# Altium PCB MasterBoard.PcbDoc (part 2 of 3)
Units mil, origin at the board's own origin, x right, y up, seen from the top; angles counter-clockwise.
Board outline 13400 x 7290 mil, 2 copper layers (Top Layer, Bottom Layer); 563 components, 331 nets, 1403 pads, 323 vias.
Unrouted connection lines stored in the file: 87.
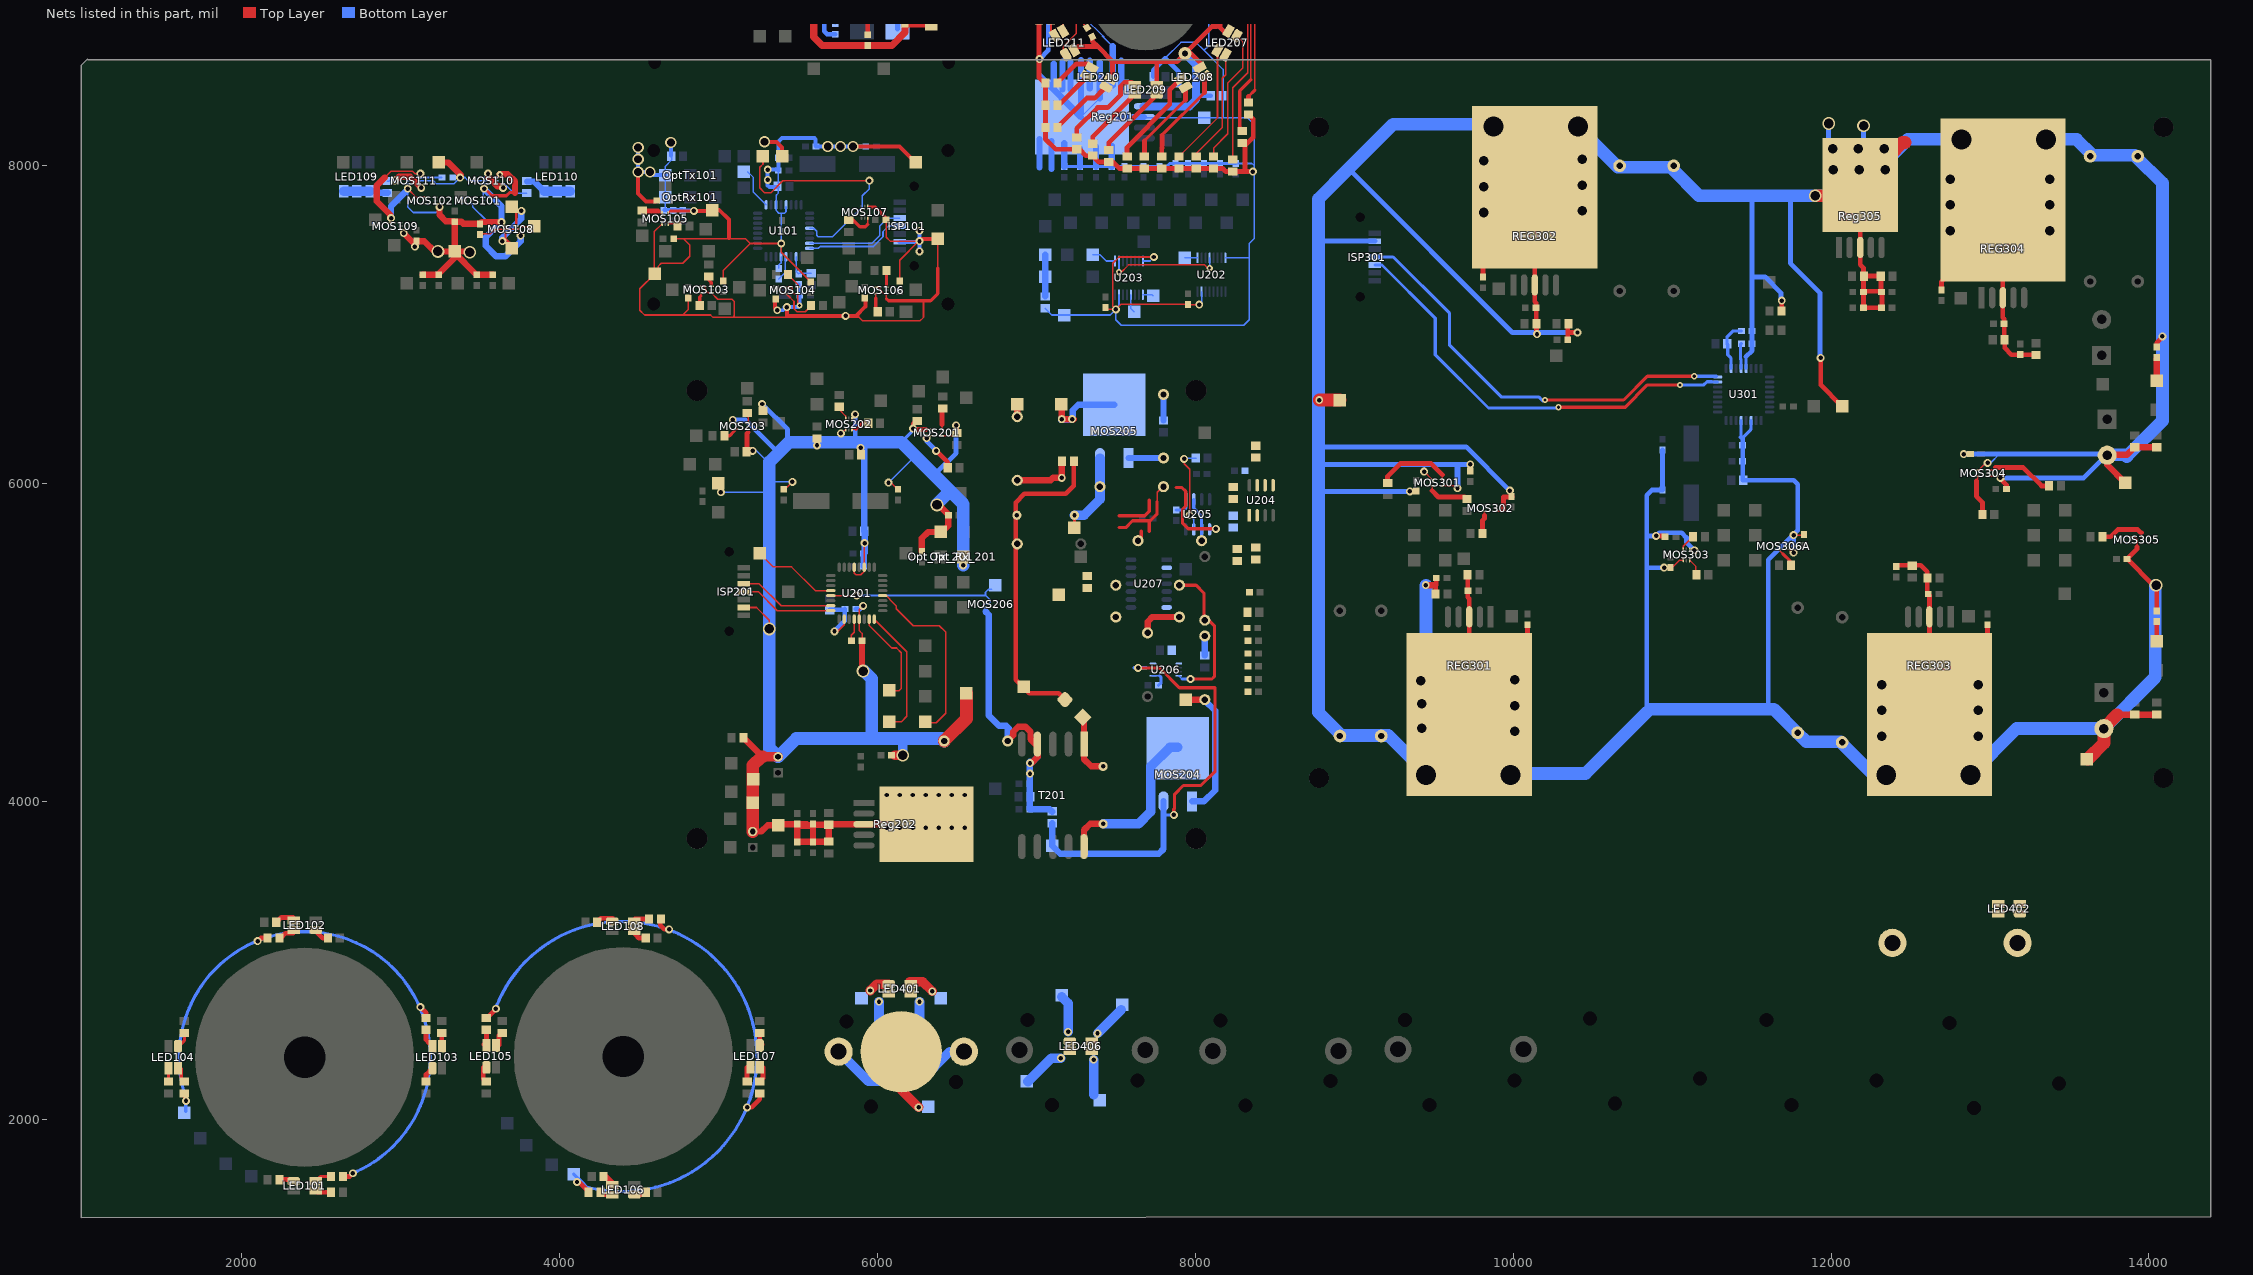
[diagram p2: the nets of this part, all layers, seen from the top]

## Via types
v1: diameter 50, hole 28, Top Layer to Bottom Layer, 217 vias
v2: diameter 80, hole 60, Top Layer to Bottom Layer, 55 vias
v3: diameter 40, hole 20, Top Layer to Bottom Layer, 25 vias
v4: diameter 70, hole 50, Top Layer to Bottom Layer, 11 vias
v5: diameter 145, hole 125, Top Layer to Bottom Layer, 8 vias
v6: diameter 80, hole 40, Top Layer to Bottom Layer, 2 vias
v7: diameter 60, hole 40, Top Layer to Bottom Layer, 2 vias
v8: diameter 50, hole 28, Top Layer to Bottom Layer, tented top, 1 vias
v9: diameter 100, hole 80, Top Layer to Bottom Layer, 1 vias
v10: diameter 100, hole 60, Top Layer to Bottom Layer, 1 vias

## Nets (pads, with @x,y where several pads share a name; then routed paths per layer and width w, separated by ;. In a path a pad name is that pad's centre, name@x,y a point inside that pad or via, vN(x,y) a via of type N, cw(c..) or ccw(c..) an arc to the next point about the centre after c; other vN are vias at no path point) (continued)
DATA203A: I207.1 U203.9 | length 68.1
  Bottom Layer w10: U203.9@7670,7187.4 7727.6,7187.4 I207.1@7735,7180
DATA204: I220.1 U201.28 | length 1163.7
  Top Layer w10: U201.28@6033.39,5294.25 6056.71,5294.25 6077.91,5273.05 6077.91,5269.83 6097.91,5249.83 6097.91,5248.8 6117.91,5228.8 6117.91,5212.09 6225,5105 6390,5105 6430,5065 6430,4555 6370,4495 I220.1@6305,4495
DATA204A: I208.1 U203.12 | length 115.7
  Bottom Layer w10: U203.12@7595,7187.4 7595,7100 I208.1@7615,7080
DATA_SELECT_201: I215.1 U201.23 | length 618.8
  Top Layer w10: U201.23@5948.74,5146.61 5948.74,5106.26 6090,4965 6120,4965 6150,4935 6150,4710 6135,4695 I215.1@6075,4695
DATA_SELECT_201A: I203.1 U202.1 | length 80
  Bottom Layer w10: I203.1@7935,7420 U202.1@8015,7420
DATA_SELECT_202: I218.1 U201.24 | length 825.9
  Top Layer w10: U201.24@5980.24,5146.61 6185,4941.85 6185,4535 6150,4500 I218.1@6075,4500 I218.1@6070,4500
DATA_SELECT_202A: I204.1 U203.1 | length 156.6
  Bottom Layer w10: I204.1@7355,7440 7400,7440 7440,7400 U203.1@7495,7400
EL_CONTROL_201: MOS206.2 TP225.1 U201.13 | length 1141.7
  Top Layer w10: U201.13@5706.61,5294.25 v1@5870,5294.25
  Bottom Layer w10: v1(5870,5295) 6680,5295 ; MOS206.2@6670,5240 MOS206.2@6680,5240 6697.06,5240 6708.78,5251.72 6708.78,5268.28 6682.06,5295 6680,5295 ; TP225.1@6720,5335 6700,5335 6680,5315 6680,5295
G_CONTROL_101: I110.1 I138.1 MOS108.3 MOS108.6 | length 469.9
  Top Layer w15: MOS108.3@3660,7577.5 3660,7540 3700,7500 I110.1@3700,7480 ; I138.1@3700,7735 3726.93,7708.07 3726.93,7625
  Bottom Layer w40: v1(3640,7525) 3640,7545 3760,7665 v1@3760,7710
  other v1: 3760,7715
G_CONTROL_101L: I112.1 R139.1 R141.1 R143.1 R145.1 | length 4043.2
  Top Layer w10: 2680,1640 v1(2700,1660)
  Top Layer w20: R145.1@1640,2162.6 1640,2125 v1(1650,2115)
  Top Layer w30: v1(2100,3120) 2120,3140 R141.1@2165,3140 ; R139.1@2633.46,1640 2680,1640 ; v1(3125,2705) 3160,2670 R143.1@3160,2633.46
  Bottom Layer w20: I112.1@1648.73,2048.73 1648.73,2115 1648.73,2134.69 cw(c2396.34,2390) v1@2699.75,1660.59
G_CONTROL_101R: I114.1 R147.1 R149.1 R151.1 R153.1 | length 4469.8
  Top Layer w30: R147.1@3540,2633.46 3600,2693.46 v1(3600,2695) ; v1@4110,1600 4126.54,1600 R149.1@4186.54,1540 ; R153.1@4633.46,3260 4633.46,3221.54 4660,3195 v1(4690,3195) ; v1(5180,2075) 5210,2075 5260,2125 R151.1@5260,2165
  Bottom Layer w20: v1@3596.36,2695.15 cw(c4391.6,2395) 4163.91,1576.06 ; I114.1@4090,1655 4145,1600 4165,1580
  other v1: 4110,1605
G_PWM_101: I131.1 U101.1 | length 254.2
  Bottom Layer w10: I131.1@5185,7960 5220,7925 5220,7833.15 U101.1@5299.76,7753.39
G_PWM_101A: I105.1 MOS108.2 MOS108.5 R108.2 | length 363.6
  Top Layer w10: R108.2@3500,7570 3565,7570 3595,7600 MOS108.2@3660,7600 MOS108.5@3726.93,7600 3743.99,7600 3758.99,7615 3840,7615 I105.1@3845,7615
GND101: C101.1 C102.1 C103.1 C104.1 C105.1 C106.1 C107.1 C108.1 C109.1 C126.1 C127.1 C128.1 I104.1 ISP101.6 MOS103.1 MOS103.4 MOS104.1 MOS104.4 MOS105.1 MOS105.4 MOS106.1 MOS106.4 MOS107.1 OptRx101.3 OptTx101.3 R112.1 R113.1 R114.1 R119.1 R120.1 R121.1 R125.1 R126.1 R127.1 S101.2 TP121.1 TP122.1 TP123.1 U101.3 U101.5 U101.21 | length 11585.5
  Top Layer w10: TP123.1@4595,7340 4595,7583.07 MOS105.4@4645,7633.07 ; MOS105.1@4685,7700 4700,7715 ; R119.1@4715,7540 R119.1@4718.46,7540 4780,7540 ; R113.1@4810,7166.54 4810,7095 4775,7060 ; MOS103.1@4890,7240 4910,7240 4918.78,7231.22 4918.78,7216.22 4935,7200 4955,7200 4955.96,7199.04 4995,7160 5085,7160 5100,7145 5100,7055 5090,7045 ; R121.1@5030,7275 5030,7340 5200,7510 ; MOS104.4@5430,7235 MOS104.4@5433.07,7235 5455,7235 5465,7225 5465,7205 5475,7195 MOS104.1@5500,7195 5500,7130 v3(5510,7120) v3@5515,7115 ; 5445,7045 5090,7045 ; R114.1@5580,7270 5395,7455 v1(5395,7510) 5200,7510 ; 5875,7055 5905,7025 6270,7025 6290,7045 6290,7145 ; MOS106.1@5990,7235 6007.06,7235 6025,7217.06 6025,7209.87 6039.87,7195 MOS106.4@6056.93,7195 ; R126.1@6055,7660 6055,7550 6080,7525 v1@6260,7525 ; 6056.93,7163.07 MOS106.4@6056.93,7195 ; MOS106.4@6060,7195 MOS106.4@6056.93,7195 ; R125.1@6140,7273.46 6140,7405 v1@6260,7525 ; v1(6265,7525) v1@6260,7525 ; v1@6265,7530 6262.5,7527.5 v1@6260,7525 ; 6380,7360 S101.2@6380,7525 ; 4775,7060 4535,7060 4505,7090 4505,7225 TP123.1@4600,7320 4620,7340 4620,7365 4640,7385 4775,7385 4820,7430 4820,7500 4780,7540 ; 4775,7060 4950,7060 4965,7045 5090,7045 ; 4780,7540 5170,7540 5200,7510
  Top Layer w20: 4700,7715 v1(4845,7715) ; 5950,7740 5985,7740 6053.46,7671.54 R126.1@6053.46,7660 ; 6056.93,7163.07 6070,7150 6335,7150 6380,7195 6380,7355
  Top Layer w25: v4(4495,7960) 4495,7825 4545,7775 R120.1@4605,7775 ; v1(4845,7715) 4960,7715 I104.1@4970,7715 ; I104.1@4960,7720 5005,7720 5065,7660 5065,7545 ; v4(5290,8150) 5365,8150 5400,8115 TP122.1@5400,8060 TP122.1@5400,8055 ; R112.1@5355,7155 5355,7105 v1(5370,7090) ; v1(5430,7110) 5430,7055 5431.87,7053.13 5800,7053.13 5863.13,7053.13 5865,7055 ; v1(5800,7055) 5865,7055 ; v4@5850,8120 6140,8120 TP121.1@6240,8020 ; 5875,7055 5865,7055 ; R127.1@5925,7165 5925,7115 5865,7055 ; v1@6273.9,7538.9 S101.2@6380,7538.9
  Bottom Layer w10: C127.1@4660,7720 4665.04,7725.04 OptRx101.3@4665.04,7800 4665.04,7929.96 4665,7930 OptTx101.3@4665.04,7940 4665,7995 4705,8035 C126.1@4705,8055 ; 5310,7875 5320,7865 ; v1(5310,7975) v1@5310,7980 ; C104.1@5375,7855 5375,7825 5362.76,7812.76 U101.3@5362.76,7753.39 5362.76,7717.24 5380,7700 5395,7700 ; C104.1@5376.54,7876.54 C106.1@5376.54,7970 ; C107.1@5380,7355 5380,7375 5394.25,7389.25 U101.21@5394.25,7426.61 ; U101.21@5395,7445 v1(5395,7510) 5395,7700 ; U101.5@5425,7740 5425,7710 5415,7700 5395,7700 ; C128.1@5505,7185 5508.27,7181.73 C128.1@5510,7180 ; v4(5687.5,8120) v4@5690,8120 ; v1@6265,7455 v1(6265,7460) ; v1@6265,7520 v1(6265,7525)
  Bottom Layer w25: v4(4495,8115) v4(4495,8040) v4(4495,7960) v4(4570,7960) ; v4@4575,7960 4595,7940 OptTx101.3@4665.04,7940 ; C127.1@4660,7720 4715,7720 C102.1@4770,7720 ; C126.1@4700,8065 v4(4700,8145) ; C102.1@4775,7718.46 v1@4840,7718.46 ; v4@5300,8150 5375,8150 5400,8175 ; 5310,7875 v1(5310,7910) v1(5310,7975) C106.1@5365,7975 ; 5320,7865 5372.6,7865 C104.1@5375,7865 ; v1(5370,7090) 5405,7090 v1@5425,7110 ; C106.1@5376.54,7970 C105.1@5376.54,8048.46 ; C105.1@5376.54,8050 5376.54,8141.54 ; 5405,8175 5600,8175 ; v1@5415,7110 v1@5425,7110 ; C128.1@5505,7185 C108.1@5505,7251.54 ; C128.1@5511.54,7185 5511.54,7120 5511.54,7116.54 5505,7110 v1(5430,7110) v1@5425,7110 ; 5605,8175 5600,8175 ; C101.1@5610,8125 5610,8165 5600,8175 ; C101.1@5613.46,8120 v4(5687.5,8120) ; v4@5693.46,8120 v4(5767.5,8120) v4(5847.5,8120) C103.1@5925,8120 ; ISP101.6@6140,7520 6265,7520 v1(6265,7460) ; v1(6265,7525) v1(6265,7590)
GND101A: C122.1 C123.1 C124.1 C125.1 I148.1 MOS101.1 MOS101.4 MOS102.1 MOS102.4 MOS108.1 MOS108.4 MOS109.1 MOS109.4 MOS110.1 MOS110.4 MOS111.1 MOS111.4 R108.1 R109.1 R110.1 R111.1 | length 4535.8
  Top Layer w10: 2900,7925 2940,7965 3074.5,7965 3089.5,7950 v1(3125,7950) ; v1(3045,7855) 3100,7800 MOS102.4@3153.07,7800 ; MOS102.1@3220,7760 3240,7740 v1(3245,7740)
  Top Layer w20: v1@3535,7850 3575,7810 3665,7810 3685,7830 3720,7830
  Top Layer w40: 2900,7925 2850,7875 2850,7775 2935,7690 v1@2935,7670 ; v1(3020,7575) 3090,7505 v1@3090,7495 ; R109.1@3100,7525 3150,7525 3215,7460 v2(3235,7460) I148.1@3340,7460 ; C125.1@3140,7313.46 3233.46,7313.46 3340,7420 ; v1(3245,7740) 3245,7690 3285,7650 3335,7650 3340,7645 I148.1@3340,7460 ; I148.1@3340,7450 3476.54,7313.46 C122.1@3480,7313.46 C124.1@3580,7313.46 ; R110.1@3340,7646.54 3383.46,7646.54 3395,7635 R108.1@3490,7635 ; v2@3435,7460 I148.1@3340,7460 ; R108.1@3500,7633.46 3511.54,7645 v1(3635,7645) ; v3(3625,7945) 3675,7945 3720,7900 3720,7830
  Bottom Layer w10: v1(3045,7855) 3045,7850 3045,7740 3080,7705 3225,7705 v1@3245,7725 ; MOS111.1@3115,7925 R111.1@3260,7925 ; MOS101.4@3453.07,7760 3453.07,7741.93 3545,7650 3630,7650 v1(3635,7645) ; MOS101.1@3520,7800 3520,7845 v1@3525,7850
  Bottom Layer w40: v1(2940,7670) 2940,7745 v1@3045,7850 ; v1(3525,7855) 3635,7745 v1@3635,7650 ; v1(3635,7645) 3630,7645 3535,7550 3535,7495 3600,7430 3660,7430 3755,7525 v1(3755,7560)
  other v1: 3090,7490
  other v2: 3435,7455
GND101B: C110.1 C111.1 C112.1 C113.1 C114.1 C115.1 C116.1 C117.1 C118.1 C119.1 C120.1 C121.1 I122.1 I151.1 PWR101.4 PWR102.4 R132.1 R134.1 TP124.1 Valve103.1 | length 4893
  Top Layer w10: PWR101.4@6103.66,9130 6150,9130
  Top Layer w30: R132.1@5866.54,9190 C118.1@5866.54,9390 ; 5871.54,9275 v1(5945,9275) ; 6150,9130 6177.4,9102.6 C110.1@6177.4,9010
  Top Layer w45: Valve103.1@5420,9127.48 5512.52,9127.48 5530,9110 I122.1@5600,9110 ; R132.1@5866.54,9190 5800,9190 5720,9110 I122.1@5600,9110 ; C111.1@6177.4,8893.94 C110.1@6177.4,9010 ; C113.1@6440,9012.6 C112.1@6340,9012.6 TP124.1@6340,8890 C111.1@6173.46,8890 6173.46,8838.46 6091.54,8756.54 C119.1@5940,8756.54 5653.46,8756.54 5600,8810 I122.1@5600,9110
  Top Layer w60: I151.1@5300,9410 5420,9290 v9@5420,9260 ; Valve103.1@5420,9127.48 v9(5420,9265)
  Bottom Layer w10: PWR102.4@5891.77,9260 5930,9260 v1(5945,9275)
  Bottom Layer w30: C120.1@5735,8826.54 5683.46,8826.54 5665,8845 5665,9020 v9(5420,9265) 5420,9525 5488.46,9593.46 C121.1@5815,9593.46 5951.54,9593.46 5968.46,9576.54 R134.1@5968.46,9540 6115,9540 6133.46,9521.54 6133.46,9450 C115.1@6133.46,9350 C116.1@6227.6,9350 ; v1@5930,9260 v1@5940,9270 ; C117.1@6237.6,9220 C116.1@6237.6,9360
GND201: Batt201.2 BT201.2 C203.1 C204.1 C205.1 C206.1 C207.1 C208.1 C209.1 C210.1 C214.1 C223.1 C224.1 C225.1 C226.1 C227.1 C228.1 I217.1 I234.1 I235.1 ISP201.6 L205.2 MOS201.1 MOS201.4 MOS202.1 MOS202.4 MOS203.1 MOS203.4 Opt_Rx_201.2 Opt_Tx_201.3 R249.1 R250.1 R251.1 R252.2 R256.1 R257.1 R258.1 R274.2 Reg202.3 Reg202.6 S205.2 TP227.1 U201.3 U201.5 U201.21 | length 13275.7
  Top Layer w10: ISP201.6@5160,5220 5240,5220 5320,5140 v2(5320,5085) ; R257.1@5180,6220 v1@5225,6220 ; 5186.93,6321.93 MOS203.4@5186.93,6340 ; C204.1@5420,5965 v1(5465,6010) ; v1@5775,6315 MOS202.1@5800,6340 ; MOS202.4@5840,6406.93 5860,6426.93 v1(5860,6435) ; U201.5@5854.25,5473.39 5854.25,5435.75 5865,5425 5895,5425 5920,5450 U201.3@5920,5470 ; U201.21@5885,5150 5885,5146.61 5885,5075 5903.46,5056.54 C208.1@5903.46,5010 ; U201.21@5885.75,5146.61 5885.75,5205.75 v1(5910,5230) ; v1(5895,6225) v1@5895,6245 ; U201.3@5917.24,5473.39 5917.24,5622.24 v1(5920,5625) ; v1@6085,6005 C203.1@6125,5965 ; v2(6160,4290) v2@6165,4290 ; 6305,6340 MOS201.1@6340,6340 ; MOS201.4@6406.93,6300 R250.1@6490,6300
  Top Layer w30: R257.1@5180,6220 5180,6315 5186.93,6321.93 ; R258.1@5275,6455 v1(5275,6500) ; v1(5620,6240) R256.1@5620,6286.54 ; R251.1@5893.46,6180 v1@5893.46,6218.46 ; v1@6225,6340 6305,6340 ; v1(6225,6345) 6225,6375 R249.1@6250,6400 ; v1(6495,6365) 6500,6360 R250.1@6500,6313.46
  Top Layer w40: R252.2@5157.4,4400 5277.4,4280 ; Batt201.2@5215,3810 5270,3810 5310,3850 I234.1@5375,3850 I234.1@5380,3850 ; I234.1@5381.54,3856.54 C228.1@5495,3856.54 5555,3856.54 ; C228.1@5490,3850 5495,3850 5550,3850 ; C227.1@5585,3845 5555,3845 ; C227.1@5592.6,3852.6 5595,3852.6 C226.1@5695,3852.6 C225.1@5695,3747.4 5695,3745 C224.1@5595,3745 ; C226.1@5695,3856.14 Reg202.3@5915,3856.14 6060,3856.14 Reg202.6@6076.14,3856.14 ; v2@5903.46,4826.54 C208.1@5903.46,5010 ; C214.1@6280,5573.46 6280,5655 6320,5695 Opt_Tx_201.3@6400,5694.96 6405,5695 6445,5735 6445,5800 6445,5805 v2@6385,5865 ; 5550,3850 5555,3850 ; 5550,3850 5555,3855 5555,3850 ; 5555,3845 5495,3845 5495,3745 C224.1@5595,3745 ; 5555,3845 5555,3850 ; 5555,3850 5590,3850 5595,3845 C224.1@5595,3745
  Top Layer w60: 5277.4,4280 BT201.2@5375,4280 ; R274.2@6110,4290 v2(6160,4290)
  Top Layer w80: Batt201.2@5215,3810 I217.1@5215,3990 5215,4225 5270,4280 5277.4,4280 ; L205.2@6422.5,4382.5 L205.2@6420,4380 6560,4520 TP227.1@6560,4680
  Bottom Layer w10: v1(5015,5945) 5305,5945 5310,5950 ; v1@5225,6220 5305,6140 ; 5320,6010 v1(5465,6010) ; v1(6070,6005) 6225,6160
  Bottom Layer w20: 6150,6260 v1@6225,6335
  Bottom Layer w30: v1(5090,6400) 5170,6400 5365,6205 ; v1(5275,6500) 5435,6340 5435,6270 ; 5860,6265 v1(5860,6435) ; C209.1@5863.46,5210 5890,5210 v1(5910,5230) ; 6365,6060 6495,6190 v1(6495,6365)
  Bottom Layer w40: C207.1@5913.46,5480 C206.1@5913.46,5560 C206.1@5913.46,5563.46 ; C206.1@5915,5560 5920,5565 v1(5920,5625) C205.1@5920,5700 ; C205.1@5917.4,5700 v1@5917.4,6225
  Bottom Layer w60: v2(6160,4290) 6160,4390
  Bottom Layer w80: v2@5915,4820 5965,4770 5965,4395 ; v2@6375,5870 6445,5940 ; L205.2@6420,4380 6405,4395 5965,4395 ; v1(6540,5485) 6540,5870 6150,6260 5895,6260 5770,6260 5620,6260 5445,6260 5320,6135 5320,6010 v2(5320,5085) 5320,4335 BT201.2@5375,4280 5490,4395 5965,4395
  other v1: 6060,3835 6141.67,3835 6223.33,3835 6305,3835 6386.67,3835 6468.33,3835 6550,3835 6060,4040 6141.67,4040 6223.33,4040 6305,4040 6386.67,4040 6468.33,4040 6550,4040 5215,6205 5770,6315
  other v2: 5910,4820 6375,5865
GND201A: C201.1 C202.1 C212.2 C215.1 C239.2 C240.1 C241.1 C244.2 I210.1 I214.1 R201.2 R202.1 R203.2 R204.1 R205.2 R206.1 R207.2 R208.1 R209.2 R210.1 R211.1 R212.1 R213.1 R214.1 R215.1 R216.1 R217.1 R218.1 R219.1 R220.1 R221.1 R222.1 R223.1 R224.1 R225.1 R226.1 R227.1 R228.1 R229.1 R230.1 R231.1 R232.1 R233.1 R234.1 R235.1 R236.1 R237.1 R238.1 R239.1 R240.1 R241.1 R242.1 R243.1 R244.1 R245.2 R259.2 Reg201.3 Reg201.6 U202.8 U202.15 U203.8 U203.15 | length 20021.8
  Top Layer w10: R213.1@7035,9477.4 7035,9500 7010,9525 7010,9650 7017.4,9657.4 R212.1@7075,9657.4 ; R238.1@7050,8520 R238.1@7057.6,8520 ; v1@7265,9210 C240.1@7311.34,9256.34 ; v1(7300,8935) 7300,8887.25 C202.1@7318.27,8868.98 ; C212.2@7446.54,7095 v1(7500,7095) ; v1(7740,7425) 7520,7425 7480,7385 7480,7115 v1(7500,7095) ; C215.1@7955,7126.54 7531.54,7126.54 v1(7500,7095) ; C215.1@7956.54,7125 v1(8025,7125) ; v1(8081.54,8963.46) C241.1@8081.54,9060
  Top Layer w30: R243.1@7037.6,9140 R241.1@7037.6,9040 7037.6,8992.6 7017.6,8972.6 R242.1@7017.6,8920 7017.6,8670 7017.6,8552.4 R238.1@7050,8520 ; R238.1@7057.6,8520 R239.1@7057.6,8380 R240.1@7057.6,8240 7057.6,8167.4 7122.4,8102.6 R235.1@7255,8102.6 7272.4,8102.6 7312.4,8062.6 R236.1@7355,8062.6 7355,8060 7392.4,8022.6 R237.1@7455,8022.6 7482.4,8022.6 7522.4,7982.6 R232.1@7571.25,7982.6 R233.1@7680,7982.6 R234.1@7788.75,7982.6 R229.1@7897.5,7982.6 R230.1@8006.25,7982.6 R231.1@8115,7982.6 8172.4,7982.6 8192.4,7962.6 R226.1@8235,7962.6 8312.6,7962.6 ; R212.1@7075,9657.4 7075,9710 7102.4,9737.4 R211.1@7175,9737.4 7175,9840 ; v6(7080,9840) 7175,9840 ; v1(8305,9900) 8255,9850 8255,9797.4 ; R228.1@8335,8322.6 8365,8292.6 8365,8177.4 8312.6,8125 8312.6,7962.6 ; R223.1@8335,9557.4 8365,9587.4 8365,9730 8337.6,9757.4 R224.1@8295,9757.4 8255,9797.4 ; v1(8362.4,7962.6) 8312.6,7962.6 ; 7175,9840 7212.4,9877.4 R216.1@7275,9877.4 7275,9915 7297.4,9937.4 R215.1@7377.5,9937.4 R214.1@7480,9937.4 R219.1@7582.5,9937.4 R218.1@7695,9937.4 R217.1@7795,9937.4 R222.1@7890,9937.4 7975,9937.4 7987.4,9925 7995,9925 8047.4,9925 R220.1@8095,9877.4 8167.6,9877.4 8195,9850 R225.1@8195,9797.4 8255,9797.4
  Bottom Layer w10: 7025,8562.44 v1@7025,8670 ; R259.2@7055,7102.6 7097.6,7060 I210.1@7175,7060 7465,7060 v1(7500,7095) ; Reg201.6@7110,8500 7281.3,8328.7 7281.3,8306.14 Reg201.6@7400,8424.84 ; v1@7265,9200 7535,9470 7870,9470 8085,9255 8085,8963.46 8085,8755 8055,8725 ; v1(7300,8935) 7422.5,8812.5 ; 7415,8815 7480,8750 ; U203.15@7520,7187.4 7520,7115 v1(7500,7095) ; U203.8@7670,7400 7715,7400 v1(7740,7425) ; Reg201.3@7675,8306.14 7681.14,8300 I214.1@8055,8300 8175,8300 ; 7810,8675 7910,8775 8005,8775 8055,8725 ; v1(8025,7125) 8040,7140 U202.15@8040,7207.4 ; U202.8@8190,7420 8340,7420 ; R201.2@8255,8013.46 8356.54,8013.46 8370,8000 ; v1@8370,7960 8370,7540 8340,7510 8340,7420 ; v1@8370,7962.6 8370,8000 ; v1(7500,7095) 7500,7030 7535,6995 8305,6995 8340,7030 8340,7420 ; 8055,8725 8175,8605 8175,8440 8175,8300 ; 8175,8300 8330,8300 8370,8260 8370,8000
  Bottom Layer w20: R245.2@7175,7993.46 R244.1@7275,7993.46 R210.1@7375,7993.46 R208.1@7475,7993.46 R206.1@7555,7993.46 R204.1@7675,7993.46 R202.1@7775,7993.46 7818.46,7993.46 7838.46,8013.46 R209.2@7875,8013.46 R207.2@7955,8013.46 R205.2@8055,8013.46 R203.2@8155,8013.46 R201.2@8255,8013.46
  Bottom Layer w30: v1(7020,8670) 7075,8725 7075,9220 7155,9300 ; v6(7080,9840) 7080,9375 7155,9300 ; v1(7265,9190) 7155,9300 ; C244.2@7735,8560 7735,8600 7810,8675 7895,8590 C239.2@7895,8513.46 ; 7875,9470 v1(8305,9900) ; v1(8362.4,7962.6) v1@8365,7960
  Bottom Layer w40: 7020,7990 Reg201.6@7020,8165 ; 7025,8562.44 Reg201.6@7281.3,8306.14 ; 7095,7980 Reg201.6@7095,8155 ; Reg201.6@7110,8500 7110,8640 ; Reg201.6@7165,8480 7165,8655 ; R245.2@7175,7993.46 Reg201.6@7175,8140 ; Reg201.6@7215,8480 7215,8655 ; R244.1@7275,7993.46 Reg201.6@7275,8105 ; Reg201.6@7281.3,8328.7 7281.3,8663.7 ; Reg201.6@7335,8485 7335,8660 ; R210.1@7375,7993.46 Reg201.6@7375,8120 ; Reg201.6@7400,8424.84 7400,8650 ; R208.1@7475,7993.46 Reg201.6@7475,8125 ; Reg201.6@7480,8504.84 7480,8750 ; Reg201.6@7516.14,8306.14 Reg201.3@7675,8306.14 ; Reg201.6@7535,8485 7535,8660
GND301: C301.1 C302.1 C303.1 C304.1 C305.1 C306.1 C307.1 C308.1 C309.1 C310.1 C311.1 C312.1 C313.1 C314.1 C315.1 C316.1 C317.1 C318.1 C319.1 C320.1 C321.1 C322.1 C323.1 C324.1 C325.1 C326.1 C327.1 C328.1 C329.1 C330.1 C331.1 C332.1 C333.1 ISP301.6 MOS301.1 MOS301.4 MOS302.1 MOS303.1 MOS303.4 MOS304.1 MOS304.4 MOS305.1 MOS306A.4 P301.2 P302.2 R301.2 R302.1 R303.2 R304.1 R305.1 R308.2 R309.2 R310.1 R312.1 R313.1 R314.1 R315.1 R319.1 R320.1 R321.1 R325.1 R326.1 R327.1 R331.1 R332.1 R333.1 R335.1 R336.1 R337.1 REG301.3 REG301.6 REG302.3 REG302.6 REG303.3 REG303.6 REG304.3 REG304.6 Reg305.3 Reg305.6 S301.2 TP319.1 TP320.1 TP321.1 U301.3 U301.5 U301.21 | length 40313.2
  Top Layer w10: v1(9440,6075) MOS301.1@9490,6025 ; MOS301.4@9556.93,5985 9640,5985 9652.5,5972.5 v8@9655,5970 ; MOS302.1@9890,5825 9930,5825 9940,5835 ; R326.1@11000,5470 11048.07,5518.07 MOS303.4@11070,5518.07 ; MOS303.1@11110,5585 11135,5585 v1(11140,5580) ; MOS306A.4@11736.93,5585 11756.93,5565 v1(11765,5565) ; v1(11765,5675) R325.1@11830,5675 ; MOS304.4@12923.07,6085 12930,6085 v1@12975,6130 ; MOS304.1@12990,6045 13055,6045 v1(13065,6035) v1@13055,6040 ; MOS305.1@13890,5665 13910,5665 13925,5650 13925,5600
  Top Layer w30: R319.1@9385,5950 R319.1@9390,5950 ; C304.1@9512.6,5305 9512.6,5357.4 ; 9516.54,5361.54 C303.1@9516.54,5405 ; C302.1@9710,5425 9711.3,5423.7 9715,5420 9715,5325 9715,5285 9723.86,5276.14 REG301.3@9723.86,5161.06 REG301.6@9723.86,4971.14 ; R310.1@9810,7298.46 REG302.6@9810,7410 ; 9940,5835 9940,5915 9980,5915 9990,5915 9995,5915 9995,5918.46 R321.1@9995,5920 ; REG301.6@10090,5050 R302.1@10090,5111.54 ; REG302.6@10136.14,7393.86 REG302.3@10136.14,7248.94 10136.14,7143.86 10145,7135 10145,7105 C306.1@10145,7010 ; v1@10147.4,6942.6 C306.1@10147.4,7005 ; C307.1@10343.46,6905 C308.1@10343.46,7003.46 ; 10350,6950 v1(10405,6950) ; v1(10900,5670) R327.1@10955,5670 ; R313.1@11685,7090 11690,7095 v1(11690,7150) ; v1(11935,6790) 11935,6620 S301.2@12065,6490 ; Reg305.6@12183.86,7803.86 Reg305.3@12183.86,7485 12183.86,7376.14 12205,7355 12205,7305 C327.1@12205,7300 ; C325.1@12310,7210 12210,7210 C328.1@12205,7205 ; C311.1@12415,5485 12510,5485 12565,5485 12605,5445 12605,5405 12605,5310 12610.77,5304.23 12618.86,5296.14 REG303.3@12618.86,5161.06 REG303.6@12618.86,5036.14 ; R335.1@12695,7218.46 12695,7270 REG304.6@12775,7350 ; REG303.6@12985,5050 R312.1@12985,5111.54 ; v1@13065,6030 13103.46,5991.54 R331.1@13103.46,5965 ; REG304.6@13081.14,7333.86 REG304.3@13081.14,7168.94 13081.14,7043.86 13090,7035 13090,7005 13090,6910 13093.7,6906.3 C314.1@13095,6905 ; C314.1@13092.4,6905 13092.4,6852.6 13135,6810 13190,6810 13290,6810 C316.1@13295,6810 ; 13925,5600 13925,5586.54 R333.1@13863.46,5525 v2@14028.46,5360 ; R305.1@14050,5198.46 v2@14050,5355 ; R304.1@14050,6858.46 14050,6885 14087.5,6922.5 v1@14090,6925 ; C328.1@12205,7205 C327.1@12205,7300 ; C328.1@12205,7205 12205,7105 C324.1@12316.54,7105 12320,7105 12320,7195 12315,7200 12315,7205 12315,7305 C326.1@12312.6,7305 12210,7305 12208.7,7303.7 C327.1@12205,7300
  Top Layer w40: v1(9450,5360) 9505,5360 ; P301.2@13735,6180 13737.24,6180 13862.4,6180 C330.1@13910,6227.6 ; P301.2@13737.24,6178.07 13737.24,6117.76 TP320.1@13850,6005 ; 13800,4545 13910,4545 C333.1@14047.4,4545 ; C330.1@13917.6,6227.6 C331.1@14050,6227.6
  Top Layer w80: v1(8780,6525) TP321.1@8910,6525 ; v2(11900,7810) 12115,7810 12183.78,7878.78 12228.75,7923.75 12310,8005 12372.5,8067.5 12450,8145 12465,8145 ; TP319.1@13615,4265 13717.24,4367.24 P302.2@13717.24,4458.07 ; P302.2@13720,4465 13800,4545
  Bottom Layer w10: v1(9440,6075) 9440,6115 ; v1(12985,6130) 13005,6130 13060,6185
  Bottom Layer w20: 11434.25,6290.75 U301.5@11434.25,6396.61 ; 11450,6295 11493.74,6338.74 11493.74,6340.76 11497.24,6344.26 U301.3@11497.24,6396.61 ; U301.21@11465.75,6725 U301.21@11465.75,6723.39 11465.75,6789.25
  Bottom Layer w30: 8775,6235 8780,6230 9705,6230 v1(9980,5955) ; 8775,7525 ISP301.6@9130,7525 ; 8780,6120 v1(9730,6120) ; 8785,5950 v1(9350,5950) ; 8965,7990 8965,7980 9995,6950 10150,6950 v1(10405,6950) ; 10840,4560 10840,5470 ; C317.1@10940,5958.46 10873.46,5958.46 10840,5925 10840,5670 ; C317.1@10940,5960 C318.1@10940,6211.54 ; v1(10950,5470) 10840,5470 ; v1(11140,5580) 11090,5630 11090,5660 11060,5690 10920,5690 v1(10900,5670) 10840,5670 ; 11434.25,6290.75 11445,6280 11445,6240 11445,6140 C319.1@11445,6020 ; C319.1@11447.4,6020 11765,6020 11790,5995 11790,5705 11762.5,5677.5 11605,5520 11605,4580 ; 11465,6798.07 11503.46,6836.54 C322.1@11503.46,6880 C323.1@11503.46,6960 11503.46,7300 ; 11503.46,7806.54 11503.46,7300 ; v1@11685,7150 11685,7200 11585,7300 11503.46,7300 ; 11745,7790 11745,7385 11930,7200 v1@11930,6795 ; v1(11765,5565) v1(11765,5675) ; v2(11985,8265) 11985,8135 v2@12015,8105 ; v2@12175,8105 12205,8135 v2(12205,8250) ; v1(12835,6185) 13060,6185 13720,6185 P301.2@13730,6175 ; v1(13065,6035) 13590,6035 P301.2@13730,6175 ; P301.2@13735,6180 P301.2@13730,6175 ; 10840,5470 10840,5670
  Bottom Layer w40: v8(9650,5970) 9650,6115
  Bottom Layer w80: v1@9452.2,5357.8 9452.2,4760 9452.2,4615 9452.2,4460 9452.2,4177.8 9215,4415 9170,4415 8920,4415 8916.85,4418.15 8775,4560 8775,6235 8775,6525 8775,7525 8775,7790 8965,7980 9245,8260 9876.3,8260 10390,8260 10406.4,8243.6 10660,7990 10670,7990 R309.2@10990,7990 ; v5@9983.7,4175 10455,4175 10840,4560 ; 10860,4580 11605,4580 11640,4580 11789.35,4430.65 11845,4375 12060,4375 12066.85,4368.15 12265,4170 12347.2,4170 12878.7,4170 12880,4170 13168.07,4458.07 P302.2@13717.24,4458.07 14040,4780.83 v2@14040,5360 ; R309.2@10995.65,7984.35 11170,7810 v2(11900,7810) 12130,7810 12317.5,7997.5 12380,8060 12465,8145 ; 12485,8165 v5(12821.3,8165) ; v5(13352.8,8165) 13545,8165 R337.1@13640.65,8069.35 ; R337.1@13645,8065 13910,8065 13923.15,8051.85 14085,7890 v1(14085,6925) 14085,6395 13865,6175 ; P301.2@13730,6180 13735,6180 13737.24,6180 13850,6180 13860,6170
  other v1: 10150,6940
  other v2: 12320,4410 12925,4410 10010,4440 9425,4460 12320,4572.5 12925,4572.5 10010,4602.5 9425,4615 12320,4735 12925,4735 9420,4760 10010,4765 14045,5360 12750,7590 13375,7590 9815,7705 10435,7715 12750,7752.5 13375,7752.5 9815,7867.5 10435,7877.5 12750,7915 13375,7915 12015,7975 12177.5,7975 12340,7975 9815,8030 10435,8040 12010,8105 12172.5,8105 12335,8105
  other v5: 9452.2,4165 9983.7,4165 12347.2,4165 12878.7,4165 9876.3,8245 10407.8,8245
HEADLIGHT_201: I219.1 U201.12 | length 542.3
  Top Layer w10: I219.1@5260,5560 5345,5475 5460,5475 5610,5325 U201.12@5705,5325
HEADLIGHT_201A: I213.1 R259.1 S203.2 | length 261.5
  Bottom Layer w40: R259.1@7055,7177.4 I213.1@7055,7300 S203.2@7055,7438.9
HEADLIGHTENABLE_101: I130.1 U101.12 | length 1572.7
  Top Layer w10: I130.1@5280,8060 5280,8010 5260,7990 5260,7860 5290,7830 5330,7830 5405,7905 v1(5950,7905)
  Bottom Layer w10: U101.12@5573.39,7605.75 5599.25,7605.75 5617.91,7587.09 5617.91,7561.63 5628.28,7551.26 5716.26,7551.26 5905,7740 5905,7810 5950,7855 v1(5950,7905)
HEADLIGHTENABLE_101A: I149.1 MOS110.2 MOS110.5 MOS111.2 MOS111.5 R111.2 | length 763.2
  Top Layer w40: I149.1@3240,8020 3300,8020 v1@3380,7940
  Bottom Layer w10: MOS111.5@3048.07,7905 MOS111.2@3115,7905 3205,7905 3225,7885 3335,7885 3351.73,7901.73 v1(3375,7925) 3405,7925 3425,7905 MOS110.2@3535,7905 MOS110.5@3601.93,7905 MOS110.5@3605,7905
HVDC_201: C213.2 D201.1 R264.2 R273.1 TP217.1 | length 2035.3
  Top Layer w30: D201.1@7180,4640 7140,4680 7110,4680 6955,4680 6870,4765 6870,4900 6870,5880 6925,5935 7185,5935 7235,5985 R273.1@7235,6135
HVGND201: C213.1 C218.2 C219.2 C220.2 C221.2 C222.2 C230.1 C231.1 C232.1 C233.1 C234.2 C235.2 C236.2 C237.2 C238.2 C242.2 C243.2 C299.2 L205.1 MOS205.3 MOS206.1 R261.2 R263a.2 R265.2 R275.2 R276.1 T201.4 TP226.1 U204.1 U205.1 U206.5 U207.7 | length 2773.9
  Top Layer w20: TP226.1@7240,5720 C213.1@7240,5800 ; C233.1@7640,5640 7660,5660 7660,5700
  Top Layer w40: L205.1@6820,4380 6855.83,4415.83 6855.83,4437.33 6887.24,4468.74 6931.66,4468.74 6963.07,4437.33 6963.07,4391.93 T201.4@7010,4345 ; v1(6960,4240) 6970,4240 7010,4280 7010,4360 T201.4@7010,4410
  Bottom Layer w10: 6680,5195 MOS206.1@6680,5220
  Bottom Layer w20: C299.2@7880,5833.46 7928.46,5833.46 7940,5845 U205.1@7940,5910
  Bottom Layer w40: 6680,5195 6700,5175 6700,4540 6765,4475 6810,4475 6830,4455 ; L205.1@6820,4380 6820,4460 ; v1@6958.46,4248.46 6958.46,4240 6958.46,4175 C222.2@6958.46,4110 6958.46,4030 C221.2@6958.46,3950 7085,3950 7098.8,3936.2 R261.2@7100,3935 ; v1@6960,4230 6965,4235 7010,4280 7010,4350
  Bottom Layer w60: C213.1@7240,5800 7300,5800 7400.47,5900.47 MOS205.3@7400.47,6160
  other v1: 6960,4175
ISENSE_201: MOS204.3 R261.1 TP220.1 U206.3 | length 2868.5
  Top Layer w20: v1@7635,4840 7775,4840 7900,4715 8125,4715 8125,4190 8035,4100 7925,4100 7870,4045 7870,3955 7865,3950 v1@7865,3910
  Bottom Layer w10: 7691.18,4841.18 U206.3@7735,4841.18
  Bottom Layer w20: v1@7616.18,4841.18 7691.18,4841.18 ; 7810,3915 v1(7865,3915)
  Bottom Layer w40: R261.1@7100,3862.6 TP220.1@7100,3720 7150,3670 7770,3670 7800,3700 MOS204.3@7800,4000
  other v1: 7640,4840
MISO101: ISP101.4 U101.16 | length 624.2
  Bottom Layer w10: U101.16@5573.39,7479.76 5628.5,7479.76 5640,7491.26 5974.54,7491.26 6035,7551.72 6035,7585 6070,7620 ISP101.4@6120,7620
MISO201: ISP201.4 U201.16 | length 594.7
  Top Layer w10: ISP201.4@5160,5320 5250,5320 5370,5200 U201.16@5705,5200
MISO301: ISP301.4 U301.16 | length 2705
  Top Layer w20: v3(10200,6525) 10695,6525 10845,6675 v3(11140,6675)
  Bottom Layer w20: ISP301.4@9130,7425 9245,7425 9600,7070 9600,6870 9925,6545 10160,6545 10185,6520 v3(10200,6525) ; v3(11140,6675) U301.16@11280,6675
MOSI101: ISP101.3 U101.15 | length 667.5
  Bottom Layer w10: U101.15@5573.39,7511.26 5966.26,7511.26 6015,7560 6015,7620 6065,7670 ISP101.3@6140,7670
MOSI201: ISP201.3 U201.15 | length 603
  Top Layer w10: ISP201.3@5160,5370 5255,5370 5395,5230 U201.15@5705,5230
MOSI301: ISP301.3 U301.15 | length 2730.9
  Top Layer w20: v3(10285,6480) 10705,6480 10845,6620 v3(11050,6620)
  Bottom Layer w20: ISP301.3@9130,7375 9175,7375 9510,7040 9510,6810 9845,6475 v3@10285,6475 ; v3(11050,6620) 11200,6620 11220,6640 11249.05,6640 11250.31,6638.74 U301.15@11286.61,6638.74
NetC107_2: C107.2 U101.20 | length 152.1
  Bottom Layer w10: C107.2@5380,7286.54 5419.09,7325.63 5419.09,7414.09 U101.20@5425,7420
NetC108_2: C108.2 L101.1 U101.18 | length 190.3
  Bottom Layer w10: U101.18@5490,7425 5490,7333.46 C108.2@5505,7318.46 ; C108.2@5507.4,7322.4 L101.1@5585,7322.4
NetC118_2: C118.2 PWR101.8 | length 163.6
  Top Layer w10: PWR101.8@6020,9301.26 6020,9370
  Top Layer w30: C118.2@5933.46,9390 6000,9390 6020,9370
NetC119_2: C119.2 R131.1 | length 113.1
  Top Layer w30: C119.2@5940,8823.46 R131.1@5940,8936.54
NetC120_2: C120.2 PWR102.8 | length 228.4
  Bottom Layer w10: C120.2@5735,8893.46 5735,8945 5815,9025 PWR102.8@5815,9088.74
NetC121_2: C121.2 R133.1 | length 93.1
  Bottom Layer w40: R133.1@5815,9433.46 C121.2@5815,9526.54
NetC201_2: C201.2 C202.2 C240.2 C241.2 LED201.2 LED202.2 LED203.2 LED204.2 LED205.2 LED206.2 LED207.2 LED208.2 LED209.2 LED210.2 LED211.2 Reg201.2 | length 4335
  Top Layer w30: LED201.2@7181.69,9270 7230,9270 7320,9360 7380,9360 ; LED211.2@7250,8735 7265,8750 7385,8750 ; 7348.05,9481.95 7368.05,9481.95 7435,9415 7500,9480 7615,9480 ; C202.2@7351.73,8811.02 7351.73,8783.27 7385,8750 ; C240.2@7358.66,9303.66 7358.66,9338.66 7380,9360 ; 7425,9405 7380,9360 ; 7480,8570 7480,8655 ; LED203.2@7615,9605 7615,9480 ; LED209.2@7757.13,8525 7757.13,8652.13 ; LED204.2@7909.07,9569.07 7875,9535 7875,9480 ; 8028.41,8651.59 7975,8705 v6(7935,8705) ; LED205.2@8128.72,9396.28 8050,9317.56 8050,9305 ; 8135,8875 8105,8875 v6(7935,8705) ; 8178.44,8846.56 8145,8880 8155,8880 8155,9060 8155,9125 8135,9145 ; LED206.2@8240.55,9145 8135,9145 ; 7385,8750 7480,8655 ; 7480,8655 7885,8655 v6(7935,8705) ; 7615,9480 7875,9480 ; 7875,9480 8050,9305 ; 8050,9305 8135,9220 8135,9145
  Bottom Layer w30: 8030,8440 C201.2@8097.6,8440
  Bottom Layer w50: Reg201.2@7675,8373.07 7963.07,8373.07 8005,8415 8005,8635 v6(7935,8705)
NetC208_2: C208.2 U201.20 | length 144.6
  Top Layer w10: C208.2@5835,5010 5835,5045 5854.25,5064.25 U201.20@5854.25,5146.61
NetC209_2: C209.2 L201.1 U201.18 | length 377.7
  Top Layer w10: v1(5730,5070) 5750,5070 5791.26,5111.26 U201.18@5791.26,5146.61
  Bottom Layer w30: L201.1@5700,5205 5790,5205 5795,5210 5795,5135 v1(5730,5070)
NetC211_1: C211.1 D201.3 T201.1 | length 403.6
  Top Layer w40: D201.3@7300,4530 T201.1@7300,4360 7300,4265 7345,4220 C211.1@7420,4220
NetC211_2: C211.2 MOS204.1 T201.10 | length 1077.3
  Top Layer w40: T201.10@7300,3715.91 7300,3820 7340,3860 C211.2@7420,3860
  Bottom Layer w60: C211.2@7420,3857.8 7642.8,3857.8 7720,3935 7720,4220 7840,4340 MOS204.1@7890,4340
NetC217_1: C217.1 EL201.2 MOS205.1 | length 566.6
  Top Layer w40: EL201.2@7160,6490 C217.1@7160,6405.04 v1@7235,6405.04
  Bottom Layer w40: C217.1@7155,6400 7225,6400 7230,6405 7230,6460 7264.65,6494.65 MOS205.1@7490.24,6494.65
  other v1: 7225,6405
NetC217_2: C217.2 L203.1 R273.2 | length 396.3
  Top Layer w40: L203.1@6880,6020 7090,6020 7105,6035 C217.2@7165,6035 ; C217.2@7160,6034.96 R273.2@7160,6140
NetC229_1: C229.1 U206.1 | length 121
  Bottom Layer w10: U206.1@7725,4790 7775,4790
  Bottom Layer w20: C229.1@7768.46,4730 7785,4746.54 7785,4780 7775,4790
NetC230_2: C230.2 U204.5
NetC231_2: C231.2 U205.5 | length 544.8
  Top Layer w20: 7880,5975 7915,5975 7940,5950 7940,5858.64 7920,5838.64 7920,5750 7955,5715 v1(8130,5715)
  Bottom Layer w20: U205.5@8090,5711.02 8126.02,5711.02 v1(8130,5715)
NetC232_2: C232.2 R271.2 U204.2 U204.6 | length 518.8
  Top Layer w10: 7760,5888.98 7760,5945 C232.2@7795,5980
  Top Layer w20: 7520,5722.6 7562.6,5722.6 7605,5765 7710,5765 ; 7710,5700 7710,5760 7760,5810 7760,5885
NetC233_2: C233.2 R272.2 U205.2 U205.6 | length 281.7
  Bottom Layer w20: U205.2@7990,5900 7990,5845 8040,5795 U205.6@8040,5715 ; C233.2@8040,5635 U205.6@8040,5711.02
NetC322_2: C322.2 U301.20 | length 160.4
  Bottom Layer w20: U301.20@11434.25,6723.39 11434.25,6779.32 11430,6783.57 11430,6875 C322.2@11435,6880
NetC323_2: C323.2 L301.1 U301.18 | length 313.5
  Bottom Layer w20: U301.18@11370,6725 11370,6790 11350,6810 11350,6875 11346.2,6878.8 11345,6880 11345,6920 11385,6960 C323.2@11436.54,6960
NetD101_3: D101.3 L102.2 PWR101.5 | length 369.3
  Top Layer w10: PWR101.5@6096.77,9301.26 D101.3@6213.78,9301.26
  Top Layer w30: L102.2@6222.52,9520.32 L102.2@6252.2,9550
  Top Layer w40: D101.3@6222.52,9310 L102.2@6222.52,9520.32
NetD102_3: D102.3 L103.2 PWR102.5 | length 420.2
  Bottom Layer w10: PWR102.5@5891.77,9088.74 5986.26,9088.74 D102.3@5997.52,9100 D102.3@6025,9100
  Bottom Layer w30: D102.3@6025,9100 6127.2,8997.8 L103.2@6127.2,8860
NetEL201_1: EL201.1 L203.2 | length 75
  Top Layer w40: L203.2@6880,6425 EL201.1@6880,6500
NetI401_1: I401.1 I403.1
NetI402_1: I402.1 I404.1 | length 947
  Bottom Layer w60: I402.1@5756.3,2425 5941.3,2240 6270,2240 6455,2425 I402.1@6550,2425
NetI405_1: I405.1 I407.1
NetI406_1: I406.1 I408.1
NetI409_1: I409.1 LED401.1 | length 132.5
  Top Layer w60: v1(5955,2810) 5994.53,2849.53 LED401.1@6071.1,2849.53
NetI410_1: I410.1 LED402.1
NetI411_1: I411.1 LED403.1
NetI412_1: I412.1 LED404.1
NetI413_1: I413.1 LED401.4 | length 164.9
  Top Layer w60: LED401.4@6205,2865 6285,2865 v1(6345,2805)
NetI414_1: I414.1 LED402.4
NetI415_1: I415.1 LED403.4
NetI416_1: I416.1 LED404.4
NetI417_1: I417.1 LED401.3 | length 205
  Bottom Layer w60: I417.1@6265,2535 v1(6265,2740)
NetI418_1: I418.1 LED402.3
NetI419_1: I419.1 LED403.3
NetI420_1: I420.1 LED404.3
NetI421_1: I421.1 LED401.2 | length 249
  Bottom Layer w60: v1(6010,2740) 6010,2590 I421.1@6080,2520
NetI422_1: I422.1 LED402.2
NetI423_1: I423.1 LED403.2
NetI424_1: I424.1 LED404.2
NetI425_1: I425.1 I427.1
NetI426_1: I426.1 I428.1
NetI429_1: I429.1 I431.1 | length 395.6
  Top Layer w60: I431.1@6150,2425 6150,2185 v1(6260,2075)
NetI430_1: I430.1 I432.1
NetI433_1: I433.1 LED405.1
NetI434_1: I434.1 LED406.1 | length 236.6
  Bottom Layer w60: I434.1@7160,2770 7200,2730 v1(7200,2550)
NetI435_1: I435.1 LED407.1
NetI436_1: I436.1 LED405.4
NetI437_1: I437.1 LED406.4 | length 212.1
  Bottom Layer w60: v1(7385,2540) I437.1@7535,2690
NetI438_1: I438.1 LED407.4
NetI439_1: I439.1 LED405.3
NetI440_1: I440.1 LED406.3 | length 220
  Bottom Layer w60: 7360,2155 v1(7360,2375)
NetI441_1: I441.1 LED407.3
NetI442_1: I442.1 LED405.2
NetI443_1: I443.1 LED406.2 | length 268.6
  Bottom Layer w60: I443.1@6947.5,2237.5 7095,2385 v1(7155,2385)
NetI444_1: I444.1 LED407.2
NetL202_1: L202.1 R260.1 | length 127.6
  Bottom Layer w40: R260.1@8060,4917.4 L202.1@8060,5045
NetL202_2: L202.2 MOS204.2 R275.1 TP216.1 | length 895.9
  Top Layer w40: TP216.1@7940,4640 L202.2@8070,4640
  Bottom Layer w40: MOS204.2@7980,4000 8055,4000 8125,4070 8125,4570 L202.2@8060,4635
NetL204_1: L204.1 R262.1 | length 162.6
  Bottom Layer w40: R262.1@7800,6397.4 L204.1@7800,6560
NetL204_2: L204.2 MOS205.2 R276.2 | length 215
  Bottom Layer w40: MOS205.2@7580,6160 L204.2@7795,6160
NetLED101_1: LED101.1 R102.2 | length 96.5
  Top Layer w30: R102.2@2233.46,1620 2327.44,1620 LED101.1@2330,1620
NetLED101_3: LED101.3 R101.2 | length 113.4
  Top Layer w20: LED101.3@2465.24,1550.47 2475.71,1540 LED101.3@2480.71,1535
  Top Layer w30: LED101.3@2475,1540 2475.71,1540 R101.2@2566.54,1540
NetLED101_4: LED101.4 R139.2 | length 112.4
  Top Layer w20: LED101.4@2465.24,1609.53 2495.71,1640 R139.2@2565,1640
NetLED102_1: LED102.1 R103.2 | length 88
  Top Layer w30: LED102.1@2472.5,3177.5 2510,3140 R103.2@2545,3140
NetLED102_3: LED102.3 R140.2 | length 124
  Top Layer w30: R140.2@2213.46,3240 2220,3240 2250,3270 LED102.3@2325,3270
NetLED102_4: LED102.4 R141.2 | length 104
  Top Layer w30: R141.2@2233.46,3140 2245,3140 2275,3170 LED102.4@2325,3170
NetLED103_1: LED103.1 R104.2 | length 102.9
  Top Layer w30: R104.2@3160,2235 3160,2280.63 LED103.1@3200.47,2321.1
NetLED103_3: LED103.3 R142.2 | length 86.3
  Top Layer w30: LED103.3@3259.53,2458.9 3259.53,2544.53 R142.2@3260,2545
NetLED103_4: LED103.4 R143.2 | length 98.5
  Top Layer w30: R143.2@3160,2570 3160,2566.54 3160,2499.37 LED103.4@3179.68,2479.68
NetLED104_1: LED104.1 R117.2 | length 75.9
  Top Layer w20: LED104.1@1620,2475 1640,2495 R117.2@1640,2542.6
NetLED104_3: LED104.3 R144.2 | length 81.3
  Top Layer w20: R144.2@1540,2240 1540,2320.63 LED104.3@1540.47,2321.1
NetLED104_4: LED104.4 R145.2 | length 90.9
  Top Layer w20: LED104.4@1620,2320 1620,2257.4 R145.2@1640,2237.4
NetLED105_1: LED105.1 R135.2 | length 99.8
  Top Layer w30: LED105.1@3520,2325 3520,2255 3540,2235 R135.2@3540,2233.46
NetLED105_3: LED105.3 R146.2 | length 89.8
  Top Layer w30: LED105.3@3620,2465 3620,2526.54 R146.2@3640,2546.54
NetLED105_4: LED105.4 R147.2 | length 102.7
  Top Layer w30: LED105.4@3525,2470 3529.68,2474.68 3540,2485 R147.2@3540,2566.54
NetLED106_1: LED106.1 R136.2 | length 80.8
  Top Layer w30: LED106.1@4470.24,1525.47 4530.47,1525.47 R136.2@4545,1540
NetLED106_3: LED106.3 R148.2 | length 71.6
  Top Layer w30: R148.2@4280,1640 4295,1640 LED106.3@4335,1600
NetLED106_4: LED106.4 R149.2 | length 67.9
  Top Layer w30: R149.2@4264.53,1525.47 LED106.4@4332.44,1525.47
NetLED107_1: LED107.1 R137.2 | length 82.7
  Top Layer w30: R137.2@5260,2546.54 5260,2485 5270.31,2474.68 LED107.1@5275,2470
NetLED107_3: LED107.3 R150.2 | length 91.5
  Top Layer w30: R150.2@5180,2233.46 LED107.3@5180,2325
NetLED107_4: LED107.4 R151.2 | length 99.8
  Top Layer w30: R151.2@5260,2233.46 5260,2240 5280,2260 LED107.4@5280,2325
NetLED108_1: LED108.1 R138.2 | length 111.9
  Top Layer w30: R138.2@4233.46,3240 4235,3240 4260,3265 4332.44,3265 LED108.1@4335,3265
NetLED108_3: LED108.3 R152.2 | length 81.9
  Top Layer w30: LED108.3@4475,3165 4500,3140 R152.2@4546.54,3140
NetLED108_4: LED108.4 R153.2 | length 91.5
  Top Layer w30: LED108.4@4475,3260 R153.2@4566.54,3260
NetLED109_2: LED109.2 R102B.2 | length 280.8
  Bottom Layer w40: LED109.2@2807.52,7837.48 LED109.2@2807.68,7837.48 2847.52,7837.48 2855,7830 2915,7830 R102B.2@2920,7830
  Bottom Layer w60: LED109.2@2642.32,7837.48 LED109.2@2725,7837.48 LED109.2@2807.52,7837.48
NetLED110_2: LED110.2 R102A.2 | length 298.6
  Bottom Layer w40: R102A.2@3795,7900 3840,7900 3902.42,7837.58 LED110.2@3902.52,7837.48
  Bottom Layer w60: LED110.2@3902.52,7837.48 LED110.2@3985,7837.48 LED110.2@4067.68,7837.48
NetLED201_1: LED201.1 R213.2 | length 96
  Top Layer w30: R213.2@7035,9402.6 7035,9395.08 LED201.1@7097.54,9332.54
NetLED201_3: LED201.3 R211.2 | length 265
  Top Layer w30: R211.2@7175,9662.6 7175,9555 7265,9465 7265,9434.88
NetLED201_4: LED201.4 R212.2 | length 176
  Top Layer w30: R212.2@7075,9582.6 7125,9532.6 7125,9493.31 LED201.4@7171.65,9446.65
NetLED202_1: LED202.1 R216.2 | length 220
  Top Layer w30: R216.2@7275,9802.6 7275,9625 7305,9595
NetLED202_3: LED202.3 R214.2 | length 325.7
  Top Layer w30: LED202.3@7480,9570 7482.74,9572.74 7520,9610 7520,9750 7480,9790 R214.2@7480,9862.6
NetLED202_4: LED202.4 R215.2 | length 222.3
  Top Layer w30: R215.2@7377.5,9862.6 7377.5,9707.5 LED202.4@7425,9660
NetLED203_1: LED203.1 R219.2 | length 172.9
  Top Layer w30: R219.2@7582.5,9862.6 7582.5,9792.5 7619.33,9755.67 LED203.1@7619.33,9705
NetLED203_3: LED203.3 R217.2 | length 329.3
  Top Layer w30: LED203.3@7775.55,9610 7815,9610 7850,9645 7850,9765 7795,9820 R217.2@7795,9862.6
NetLED203_4: LED203.4 R218.2 | length 183.3
  Top Layer w30: R218.2@7695,9862.6 7695,9820 7757.13,9757.87 LED203.4@7757.13,9705
NetLED204_1: LED204.1 R222.2 | length 233.9
  Top Layer w30: R222.2@7890,9862.6 7890,9815 7955,9750 LED204.1@7955,9655.63
NetLED204_3: LED204.3 R220.2 | length 400.2
  Top Layer w10: 8057.6,9490 8110,9490 8145,9525 8145,9650 8097.93,9697.07 R220.2@8097.93,9799.66
  Top Layer w30: R220.2@8095,9802.6 R220.2@8097.93,9799.66
NetLED204_4: LED204.4 R221.2 | length 278.7
  Top Layer w30: R221.2@7995,9842.6 7995,9785 8010,9770 8010,9710 8057.93,9662.07 LED204.4@8057.93,9590
NetLED205_1: LED205.1 R225.2 | length 281.7
  Top Layer w30: LED205.1@8195,9440.95 R225.2@8195,9722.6
NetLED205_3: LED205.3 R223.2 | length 401.1
  Top Layer w10: LED205.3@8208.92,9288.25 8208.92,9271.08 8240,9240 8325,9240 8355,9270 R223.2@8355,9482.6
NetLED205_4: LED205.4 R224.2 | length 379.3
  Top Layer w10: LED205.4@8260.06,9317.77 8285,9342.71 8285,9672.6 R224.2@8295,9682.6
NetLED206_1: LED206.1 R228.2 | length 764.3
  Top Layer w10: 8375,8475 8375,9115
  Top Layer w20: 8335,8435 8375,8475 ; 8353.7,9136.3 8375,9115
  Top Layer w30: R228.2@8335,8397.4 8335,8435
NetLED206_3: LED206.3 R226.2 | length 1038.2
  Top Layer w10: LED206.3@8230,8995 8237.87,8987.13 8329.85,8895.15 8329.85,8584.85 8235,8490 R226.2@8235,8037.4
NetLED206_4: LED206.4 R227.2 | length 802.8
  Top Layer w10: 8350,8540 8350,8985
  Top Layer w20: R227.2@8295,8217.4 8295,8230 8280,8245 8280,8470 8350,8540
NetLED207_1: LED207.1 R231.2 | length 852.8
  Top Layer w10: R231.2@8115,8057.4 8115,8110 8205,8200 8205,8520 8300,8615 8300,8777.09 LED207.1@8260.06,8817.03
NetLED207_3: LED207.3 R229.2 | length 770.3
  Top Layer w10: R229.2@7897.5,8057.4 8140.02,8299.92 LED207.3@8140.02,8727.22
NetLED207_4: LED207.4 R230.2 | length 698
  Top Layer w10: R230.2@8006.25,8076.25 8170,8240 8170,8550 8191.16,8571.16 LED207.4@8191.16,8697.7
NetLED208_1: LED208.1 R234.2 | length 594.1
  Top Layer w20: 7790,8190 8057.93,8457.93
  Top Layer w30: R234.2@7788.75,8057.4 7788.75,8108.75 7790,8110 7790,8190 ; 8057.93,8457.93 LED208.1@8057.93,8540
NetLED208_3: LED208.3 R232.2 | length 629.2
  Top Layer w30: R232.2@7571.25,8057.4 7571.25,8116.25 7840,8385 7840,8477.64 LED208.3@7909.07,8546.71
NetLED208_4: LED208.4 R233.2 | length 524.7
  Top Layer w20: 7680,8155 7938.6,8413.6
  Top Layer w30: R233.2@7680,8057.4 7680,8155 ; 7938.6,8413.6 LED208.4@7938.6,8475
NetLED209_1: LED209.1 R237.2 | length 447.2
  Top Layer w30: R237.2@7455,8097.4 7455,8145.2 LED209.1@7737.4,8427.6
NetLED209_3: LED209.3 R235.2 | length 555.6
  Top Layer w30: R235.2@7255,8177.4 7255,8235 7385,8365 7450,8365 7530,8445 7530,8500 7555,8525 LED209.3@7600.71,8525
NetLED209_4: LED209.4 R236.2 | length 393.5
  Top Layer w30: R236.2@7355,8137.4 7355,8182.99 LED209.4@7601,8429
NetLED210_1: LED210.1 R240.2 | length 387.7
  Top Layer w30: R240.2@7132.4,8240 7317.4,8425 7367.29,8425 LED210.1@7421.14,8478.86
NetLED210_3: LED210.3 R238.2 | length 241
  Top Layer w30: R238.2@7132.4,8520 7252.4,8640 LED210.3@7323.66,8640
NetLED210_4: LED210.4 R239.2 | length 240.9
  Top Layer w30: R239.2@7132.4,8380 7140,8380 LED210.4@7305,8545
NetLED211_1: LED211.1 R243.2 | length 545.1
  Top Layer w10: R243.2@7112.4,9140 7165,9087.4 7165,8985 7250,8900 7250,8830 7170,8750 7170,8697.7 LED211.1@7170,8685
NetLED211_3: LED211.3 R241.2 | length 216.3
  Top Layer w10: R241.2@7112.4,9040 7112.4,8997.6 7167.54,8942.46 LED211.3@7167.54,8846.56
NetLED211_4: LED211.4 R242.2 | length 79
  Top Layer w10: LED211.4@7092.4,8841.02 R242.2@7092.4,8920
NetLED301_2: LED301.2 R304.2 | length 140.7
  Top Layer w40: LED301.2@14050,6646.1 R304.2@14050,6786.81
NetLED302_2: LED302.2 R305.2 | length 111.5
  Top Layer w30: LED302.2@14050,5020 R305.2@14050,5131.54
NetMOS103_3: MOS103.3 R118.2 | length 83.1
  Top Layer w10: 4890,7180 MOS103.3@4890,7200
  Top Layer w20: R118.2@4882.6,7120 4882.6,7172.6 4890,7180
NetMOS103_6: MOS103.6 R106.2 | length 63.8
  Top Layer w20: R106.2@4940,7302.6 4940,7280 4955,7265 4955,7245
NetMOS104_3: MOS104.3 R105.2 | length 99.9
  Top Layer w10: R105.2@5440,7310 5500,7250 MOS104.3@5500,7235
NetMOS104_6: MOS104.6 R107.2 | length 239.6
  Top Layer w10: MOS104.6@5433.07,7195 5433.07,7186.93 5475,7145 5475,7100 5494.37,7080.63 5545.63,7080.63 R107.2@5580,7115
NetMOS105_3: MOS105.3 R115.2 | length 136.2
  Top Layer w10: 4620,7715 4635,7700 MOS105.3@4645,7700
  Top Layer w30: R115.2@4515,7715 4520,7715 4620,7715
NetMOS105_6: MOS105.6 R116.2 | length 46.9
  Top Layer w10: MOS105.6@4685,7633.07 R116.2@4731.93,7633.07
NetMOS106_3: MOS106.3 R122.2 | length 120.2
  Top Layer w10: 5990,7165 MOS106.3@5990,7195
  Top Layer w20: 5990,7165 5990,7092.6 R122.2@6002.6,7080
NetMOS106_6: MOS106.6 R124.2 | length 97.4
  Top Layer w20: 6057.4,7242.6 R124.2@6057.4,7340
NetMOS107_6: MOS107.6 R123.2 | length 188.8
  Top Layer w10: 5940,7630 MOS107.6@5940,7673.07 MOS107.6@5940,7675
  Top Layer w20: R123.2@5820,7657.4 5847.6,7657.4 5890,7615 5925,7615 5940,7630
NetMOS110_3: MOS110.3 MOS110.6 R102A.1 | length 361.9
  Top Layer w40: v1(3550,7950) 3550,7930 3610,7870 3635,7870 v1(3645,7860)
  Bottom Layer w10: MOS110.6@3601.93,7885 3645,7885 3655,7885 3662.5,7877.5 3715,7825 R102A.1@3795,7825
NetMOS111_3: MOS111.3 MOS111.6 R102B.1 | length 348.7
  Top Layer w40: v1(2965,7905) 2990,7930 3060,7930 v1(3130,7860)
  Bottom Layer w10: R102B.1@2915,7902.4 2927.4,7902.4 2947.5,7922.5 2950,7925 2965,7925 MOS111.6@3048.07,7925 MOS111.6@3050,7925
NetMOS201_3: MOS201.3 R247.2 | length 247
  Top Layer w30: v1@6365,6210 v1(6370,6205) 6442.6,6132.4 R247.2@6442.6,6100
  Bottom Layer w30: v1(6310,6285) 6310,6265 v1(6370,6205)
NetMOS201_6: MOS201.6 R246.2 | length 131.3
  Top Layer w10: MOS201.6@6406.93,6340 6406.93,6371.93
  Top Layer w30: 6406.93,6371.93 6406.93,6466.93 R246.2@6410,6470
NetMOS202_3: MOS202.3 R253.2 | length 121.6
  Top Layer w10: MOS202.3@5840,6340 5865,6340
  Top Layer w20: 5865,6340 5905,6380 R253.2@5942.6,6380 R253.2@5945,6380
NetMOS202_6: MOS202.6 R248.2 | length 89.6
  Top Layer w10: R248.2@5760,6480 5760,6465 5800,6425 MOS202.6@5800,6406.93
NetMOS203_3: MOS203.3 R255.2 | length 101.6
  Top Layer w10: 5100,6330 5110,6340 MOS203.3@5120,6340
  Top Layer w20: R255.2@5035,6300 R255.2@5037.4,6300 5070,6300 5100,6330
NetMOS203_6: MOS203.6 R254.2 | length 58.1
  Top Layer w10: MOS203.6@5186.93,6380 R254.2@5186.93,6438.07
NetMOS206_6: MOS206.6 TP223.1 U206.4 U207.2
NetMOS301_3: MOS301.3 R317.2 | length 271.8
  Top Layer w10: 9490,5955 MOS301.3@9490,5985
  Top Layer w30: 9490,5955 9530,5915 9695,5915 9707.6,5902.4 R317.2@9710,5902.4
NetMOS301_6: MOS301.6 R316.2 | length 479.7
  Top Layer w10: MOS301.6@9555,6025 9555,6055
  Top Layer w30: R316.2@9210,6002.4 9210,6045 9290,6125 9485,6125 9555,6055
NetMOS302_6: MOS302.6 R318.2 | length 140.2
  Top Layer w10: 9820,5800 MOS302.6@9820,5820
  Top Layer w30: R318.2@9807.4,5685 9807.4,5767.4 9820,5780 9820,5800
NetMOS303_3: MOS303.3 R324.2 | length 104.9
  Top Layer w10: MOS303.3@11070,5585 11070,5605 R324.2@11130,5665
NetMOS303_6: MOS303.6 R323.2 | length 109.6
  Top Layer w10: MOS303.6@11110,5518.07 11150,5478.07 R323.2@11150,5425
NetMOS304_3: MOS304.3 R329.2 | length 436.4
  Top Layer w10: MOS304.3@12990,6085 13020,6085 13035,6100
  Top Layer w30: 13035,6100 13210,6100 13325,5985 R329.2@13372.6,5985
NetMOS304_6: MOS304.6 R328.2 | length 259.7
  Top Layer w10: 12915,6015 12915,6025 12925,6035 MOS304.6@12925,6045
  Top Layer w30: 12915,6015 12915,5920 12952.6,5882.4 R328.2@12952.6,5805
NetMOS305_6: MOS305.6 R330.2 | length 299.5
  Top Layer w10: MOS305.6@13955,5665 13955,5690
  Top Layer w30: R330.2@13707.4,5665 13760,5665 13805,5710 13930,5710 13950,5690 13955,5690
NetMOS306A_3: MOS306A.3 R322.2 | length 136.1
  Top Layer w10: MOS306A.3@11670,5585 11700,5555
  Top Layer w20: 11700,5555 11745,5510 11745,5485 R322.2@11745,5480
NetPWR101_1: PWR101.1 R131.2 | length 159.7
  Top Layer w10: 6020,9083.46 PWR101.1@6020,9130
  Top Layer w30: R131.2@5940,9003.46 6020,9083.46
NetPWR101_2: PWR101.2 R129.1 R132.2 | length 393.1
  Top Layer w10: R132.2@5933.46,9190 6045.59,9190 ; PWR101.2@6045.59,9130 6045.59,9190 ; R129.1@6266.54,9190 6045.59,9190
NetPWR102_1: PWR102.1 R133.2 | length 106.5
  Bottom Layer w10: PWR102.1@5815,9260 R133.2@5815,9366.54
NetPWR102_2: PWR102.2 R130.1 R134.2 | length 544.8
  Bottom Layer w10: PWR102.2@5840.59,9260 5840.59,9304.41
  Bottom Layer w20: 5840.59,9304.41 5875,9338.82 5878.86,9342.68
  Bottom Layer w30: 5875,9338.82 5875,9513.46 R134.2@5901.54,9540 ; 5878.86,9342.68 5982.32,9342.68 6001.54,9323.46 R130.1@6001.54,9220
NetR263a_1: R263a.1 R263b.2 | length 287.4
  Top Layer w40: R263b.2@7700,5060 7700,5130 7730,5160 R263a.1@7905,5160
NetR265_1: R265.1 R266.1 U206.8 | length 997.4
  Top Layer w20: R265.1@7895,5360 8005,5360 8055,5310 8055,5150 8065,5140 8085,5140 8120,5105 8120,4785 8105,4770 v1(7970,4770)
  Bottom Layer w10: U206.8@7896.42,4790 7916.42,4770
  Bottom Layer w20: 7916.42,4770 v1@7985,4770
NetR267_2: R267.2 R271.1 U204.7 | length 271.4
  Top Layer w20: 7520,5797.4 7682.4,5797.4 7710,5825 7710,5895
NetR268_2: R268.2 R272.1 U205.7 | length 545.9
  Top Layer w10: v1(7930,6155) 7930,6125 7965,6090 v1(7965,5800)
  Bottom Layer w10: v1(7930,6155) 7935,6160 R268.2@8005,6160 ; v1(7965,5800) 7990,5775 U205.7@7990,5711.02
NetU202_4: U202.4 U203.2 | length 767.3
  Top Layer w10: v3(7520,7330) 7520,7315 7527.5,7322.5 7580,7375 8060,7375 8085,7350 8090,7345 v3(8090,7355)
  Bottom Layer w10: v3(7520,7330) U203.2@7520,7400 ; v3(8090,7355) U202.4@8090,7420